# Altium PCB PCB1.PcbDoc
Units mm, origin at the board's own origin, x right, y up, seen from the top; angles counter-clockwise.
Board outline 86.75 x 72.01 mm, 2 copper layers (Top Layer, Bottom Layer); 34 components, 29 nets, 148 pads, 15 vias.
Unrouted connection lines stored in the file: 1.
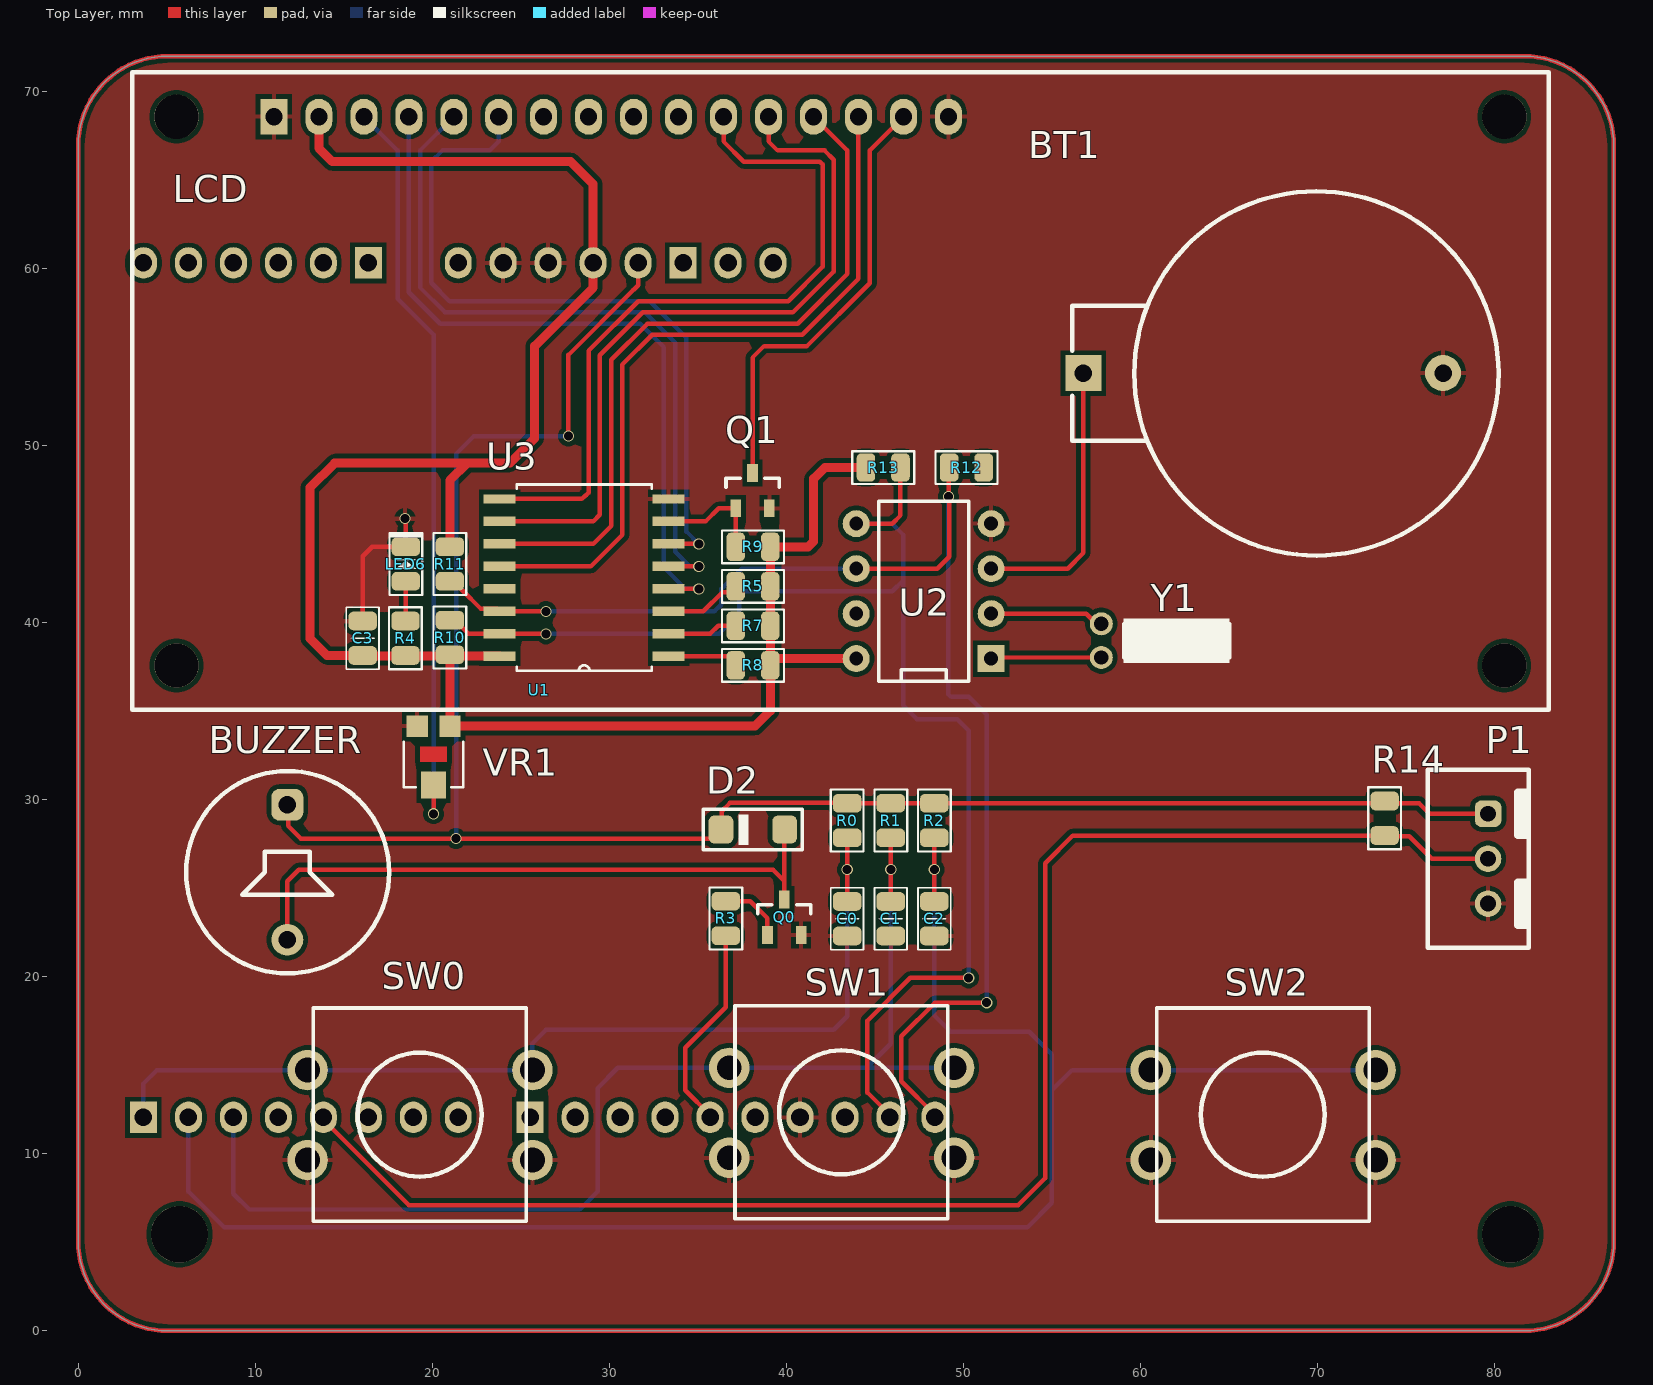
[diagram p0: Top Layer view]
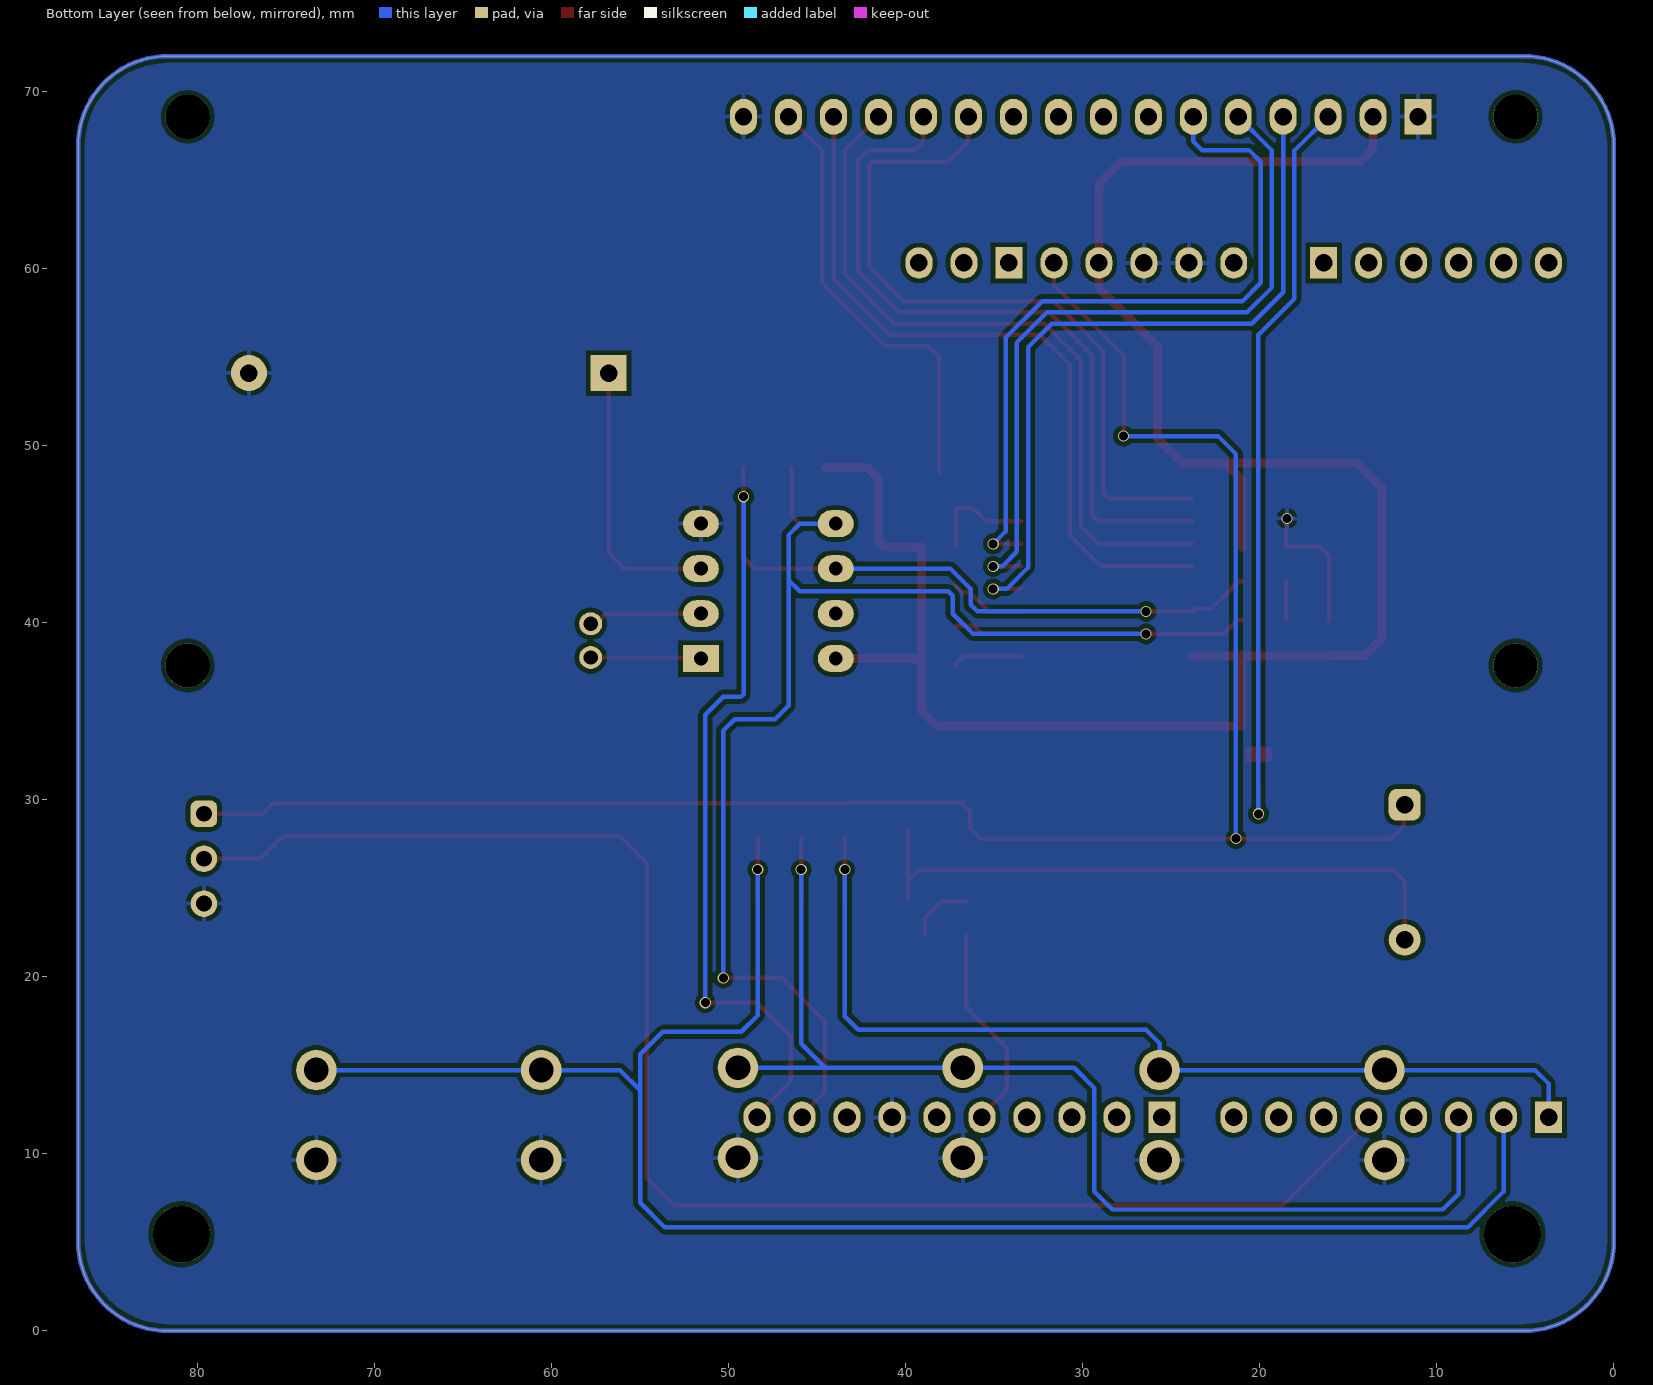
[diagram p1: Bottom Layer view, seen from below]

## Layer stack, top to bottom
Top Solder: solder mask 0.0102, Solder Resist, Dk 3.5
Top Layer: signal copper 0.0356
Dielectric 1: dielectric 0.32, FR-4, Dk 4.8
Bottom Layer: signal copper 0.0356
Bottom Solder: solder mask 0.0102, Solder Resist, Dk 3.5

## Board outline
-0.013,5.08 -0.013,66.929 cw(c5.067,66.929) 5.067,72.009 81.661,72.009 cw(c81.661,66.929) 86.741,66.929 86.741,5.08 cw(c81.661,5.08) 81.661,0 5.067,0 cw(c5.067,5.08)

## Design rules (kind name [scope] priority, off if disabled: settings)
Clearance [All] p1: gap=0.254 ignorepadtopadclearanceinfootprint=FALSE except(0: Arc-Hole Track-Hole SMDPad-Hole THPad-Hole Via-Hole Fill-Hole Poly-Hole Region-Hole Text-Hole; 0.381: Arc-Arc Arc-Track Arc-SMDPad Arc-THPad Arc-Via Track-Track Track-SMDPad Track-THPad Track-Via SMDPad-SMDPad SMDPad-THPad SMDPad-Via THPad-THPad THPad-Via Via-Via)
DiffPairsRouting [All] p1: maxlimit=0.508 minlimit=0.508 mostfreqgap=0.508 toplayer_minwidth=0.254 toplayer_maxwidth=0.508 toplayer_prefwidth=0.381 bottomlayer_minwidth=0.254 bottomlayer_maxwidth=0.508 bottomlayer_prefwidth=0.381 maxuncoupledlength=12.7
PolygonConnect [All] p1: connectstyle=Relief reliefconductorwidth=0.254 reliefentries=4 polygonreliefangle="90 Angle" airgapwidth=0.254
RoomDefinition Sheet1 [InComponentClass('Sheet1')] p1: confinementstyle=ConfineIn formatcopy=TRUE lockcomponents=FALSE outline -90.297,-40.767 -39.497,-40.767 -39.497,-15.367 -90.297,-15.367
RoutingVias [All] p1: holewidth=0.508 width=0.635 viastyle="Through Hole" minholewidth=0.508 minwidth=0.635 maxholewidth=0.508 maxwidth=0.635
SolderMaskExpansion [All] p1: expansion=0.102 istentingtop=FALSE
Width 5V [InNet('+5')] p1: maxlimit=0.508 minlimit=0.508 preferedwidth=0.508
Width Signal [All] p2: maxlimit=0.508 minlimit=0.254 preferedwidth=0.254
29 further rules are at their usual default settings.

## Components (designator, comment, footprint, x,y, rotation, side; value= is the part's Value field where it differs from the comment)
BT1 "Battery" "CON CR2032" 59.309,54.102 r0 top
BUZZER "Buzzer" BUZZER 11.811,29.718 r270 top
C0 "100nf" "C 0805 (2012)" 43.434,23.282 r270 top
C1 "100nf" "C 0805 (2012)" 45.892,23.282 r270 top
C2 "100nf" "C 0805 (2012)" 48.35,23.282 r270 top
C3 "1uf" "C 0805 (2012)" 16.068,39.125 r270 top
D2 "Diode" SOD-80 38.1,28.321 r180 top
LCD "LCD 16x2" "LCD 16x2" 11.049,68.58 r0 top
LED6 "Led" "Led SMD 0805" 18.501,43.316 r270 top
P1 "DHT" XH2.54-3P 79.629,24.13 r270 top
Q0 "Transistor NPN" SOT-23 39.878,23.368 r90 top
Q1 "Transistor NPN" SOT-23 38.086,47.459 r90 top
R0 "10k" "R 0805 (2012)" 43.434,28.829 r90 top
R1 "10k" "R 0805 (2012)" 45.892,28.829 r90 top
R2 "10k" "R 0805 (2012)" 48.35,28.829 r90 top
R3 "4.7k" "R 0805 (2012)" 36.576,23.296 r90 top
R4 "1k" "R 0805 (2012)" 18.481,39.125 r270 top
R5 "10k" "R 0805 (2012)" 38.111,42.06 r0 top
R7 "10k" "R 0805 (2012)" 38.111,39.829 r0 top
R8 "10k" "R 0805 (2012)" 38.111,37.597 r0 top
R9 "4.7k" "R 0805 (2012)" 38.111,44.291 r0 top
R10 "4.7k" "R 0805 (2012)" 20.991,39.166 r270 top
R11 "4.7k" "R 0805 (2012)" 20.991,43.316 r90 top
R12 "4.7k" "R 0805 (2012)" 50.165,48.768 r0 top
R13 "4.7k" "R 0805 (2012)" 45.466,48.768 r180 top
R14 "4.7k" "R 0805 (2012)" 73.787,28.956 r270 top
SW0 "Tact Switch" "SW/4/DIP 12x12x7" 25.654,14.732 r180 top
SW1 "Tact Switch" "SW/4/DIP 12x12x7" 49.467,14.859 r180 top locked
SW2 "Tact Switch" "SW/4/DIP 12x12x7" 73.279,14.732 r180 top
U1 "STM32F103RBT6 Shield" "Arduino Uno R3 Shield 2xPins" 34.163,60.325 r270 top
U2 "DS1307" "DIP 8" 51.562,37.973 r90 top
U3 "PCF8574" SOIC127P1032X265-16N 28.575,42.545 r180 top
VR1 "5k" "R Var 3mm" 20.066,32.385 r180 top
Y1 "Crystal" "Crystal DIP-2" 57.785,38.989 r0 top

## Footprints (in the part's own frame and the unit in brackets; to place one, negate y for a bottom-side part, rotate by r counter-clockwise, add the part's x,y. Pads: shape width x height; smd on the part's side, far side on the other; paste and mask are expansions set on the pad)
"Arduino Uno R3 Shield 2xPins" [mil]
  rect 70x60 / inner round 60 / far side rect 70x60 hole 39: 1(0,0) 7(0,-700) 13(1900,-1200) 21(1900,-340)
  oval 70x60 / inner round 60 / far side oval 70x60 hole 39: 2(0,-100) 3(0,-200) 4(0,-300) 5(0,-400) 6(0,-500) 8(0,-800) 9(0,-900) 10(0,-1000) 11(0,-1100) 12(0,-1200) 14(1900,-1100) 15(1900,-1000) 16(1900,-900) 17(1900,-800) 18(1900,-700) 19(1900,-600) 20(1900,-500) 22(1900,-240) 23(1900,-140) 24(1900,-40) 25(1900,60) 26(1900,160) 27(1900,260) 28(1900,360) 29(1900,460) 30(1900,560) 31(0,200) 32(0,100)
BUZZER [mm] "DC Buzzer 5V/12V"
  rrect50% 1.8x1.8 hole 1: 1(0,0)
  round 1.8 hole 1: 2(7.62,0)
  silkscreen extent -1.91,-5.71 9.53,5.75, body extent -5.64,-6 9.81,6, height 9.65
"C 0805 (2012)" [mm] "Chip Capacitor, 2-Leads, Body 2.0x1.3mm, IPC Medium Density"
  rrect50% 1.05x1.6 smd: 1(-0.975,0) 2(0.975,0)
  silkscreen extent -1.75,-0.92 1.75,0.92, body extent -1,-0.62 1,0.63, height 0.6
"CON CR2032" [mil]
  rect 80x80 / inner round 60 / far side rect 80x80 hole 39: 1(-100,0)
  round 80 / inner round 60 / far side round 80 hole 39: 2(700,0)
  silkscreen extent -125,-406 823,404, body extent -232,-448 898,448, height 279
"Crystal DIP-2" [mm] "Available for crystal 32.768kHz"
  round 1.3 hole 0.8: 1(0,0.953) 2(0,-0.953)
  silkscreen extent 1.25,-1.25 7.25,1.25, body extent -0.1,-1 7.04,1, height 2.1
"DIP 8" [mil] "DIP IC (2.54mm), 8 pins"
  rect 60x60 / inner round 60 / far side rect 60x80 hole 31: 1(0,0)
  round 60 / inner round 60 / far side oval 60x80 hole 31: 2(100,0) 3(200,0) 4(300,0) 5(300,300) 6(200,300) 7(100,300) 8(0,300)
  silkscreen extent -50,50 350,250, body extent -47,-15 347,310, height 201
"LCD 16x2" [mil]
  rect 60x80 / inner round 60 / far side rect 60x80 hole 38: 1(0,0)
  oval 60x80 / inner round 60 / far side oval 60x80 hole 38: 2(100,0) 3(200,0) 4(300,0) 5(400,0) 6(500,0) 7(600,0) 8(700,0) 9(800,0) 10(900,0) 11(1000,0) 12(1100,0) 13(1200,0) 14(1300,0) 15(1400,0) 16(1500,0)
  round 98.43 hole 98.43: HOLE(-216.54,0) HOLF(2736.22,0) HOLG(2736.22,-1220.47) HOLH(-216.54,-1220.47)
  silkscreen extent -315,-1319 2835,98, body extent -314,-1318 2845,100, height 710
"Led SMD 0805" [mm] "Led SMD 0805"
  rrect50% 1.05x1.6 smd: 1(-0.975,0) 2(0.975,0)
  silkscreen extent -1.75,-0.93 1.75,0.92, body extent -1.01,-0.63 1.01,0.62, height 1.1
"R 0805 (2012)" [mm] "Chip Resistor, 2-Leads, Body 2.0x1.3mm, IPC Medium Density"
  rrect50% 1.05x1.6 smd: 1(-0.975,0) 2(0.975,0)
  silkscreen extent -1.75,-0.92 1.75,0.92, body extent -1,-0.61 1,0.59, height 0.5
"R Var 3mm" [mm]
  rect 1.2x1.2 smd: 1(-0.925,-1.775) 3(0.925,-1.775)
  rect 1.4x1.5 smd: 2(0,1.55)
  Top Layer region: -0.76,-0.635 0.764,-0.635 0.764,0.254 -0.76,0.254
  silkscreen extent -1.68,-0.9 1.68,1.68, body extent -1.55,-1.85 1.55,1.84, height 1.95
SOD-80 [mm] "SOD-80 MiniMelf Diod case LL4148 3.7x1.6x0.5mm"
  rrect50% 1.4x1.6 smd: 1(1.8,0) 2(-1.8,0)
  silkscreen extent -2.79,-1.14 2.79,1.14, body extent -1.8,-0.74 1.8,0.76, height 1.5
SOIC127P1032X265-16N [mil]
  rect 71x21 smd: 1(-188,175) 2(-188,125) 3(-188,75) 4(-188,25) 5(-188,-25) 6(-188,-75) 7(-188,-125) 8(-188,-175) 9(188,-175) 10(188,-125) 11(188,-75) 12(188,-25) 13(188,25) 14(188,75) 15(188,125) 16(188,175)
  silkscreen extent -150,-207 150,207
SOT-23 [mm] "SOT23, 3-Leads, Body 3.0x2.5mm (max), Pitch 0.95mm, IPC Medium Density"
  rect 1x0.6 smd: 1(-1,0.95) 2(-1,-0.95) 3(1,0)
  silkscreen extent 0.2,-1.5 0.7,1.5, body extent -1.28,-1.46 1.27,1.46, height 0.95
"SW/4/DIP 12x12x7" [mil]
  round 90 hole 55: 1(0,0) 2(0,200) 3(500,200) 4(500,0)
  silkscreen extent 14,-138 487,336, body extent -11,-137 511,335, height 309
XH2.54-3P [mm]
  rrect50% 1.5x1.5 hole 0.9: 1(-5.08,0)
  round 1.5 hole 0.9: 2(-2.54,0) 3(0,0)
  silkscreen extent -7.58,-3.4 2.5,2.4, body extent -7.42,-3.4 2.34,2.44, height 7.21

## Part data
C0 C1 C2 C3: library part "Capacitor NP", "Capacitor non-pol"
D2: "Default Diode", Code_JEDEC=DO-214-AB, LatestRevisionDate=17-Jul-2002, LatestRevisionNote="Re-released for DXP Platform.", PackageReference=SMC, PackageVersion=Sep-1996, Published=8-Jun-2000, Publisher="Altium Limited"
LCD: "Character LCD 16x2"
LED6: "Typical LED"
P1: library part "Header 3", "Header, 3-Pin"
Q0 Q1: "NPN Bipolar Transistor"
R0 R1 R2 R3 R4 R5 R7 R8 R9 R10 R11 R12 R13 R14: library part Resistor, "Resistor", LatestRevisionDate=17-Jul-2002, LatestRevisionNote="Re-released for DXP Platform.", PackageReference=AXIAL-0.3, Published=8-Jun-2000, Publisher="Altium Limited"
SW0 SW1 SW2: library part "SW SPST-4", "Tact switch 4 pin"
U1: library part "Arduino Uno R3 shield", "Arduino Uno R3 shield pins connection"
U3: "Remote 8-Bit I/O Expander for I  2C Bus"
VR1: library part "Resistor Variable", "Resistor Variable"

## Free pads (board coordinates)
  round 3.2 hole 3.2: 4(5.715,5.461) 4(80.899,5.461)

## Via types
v1: diameter 0.635, hole 0.508, Top Layer to Bottom Layer, 15 vias

## Nets (pads, with @x,y where several pads share a name; then routed paths per layer and width w, separated by ;. In a path a pad name is that pad's centre, name@x,y a point inside that pad or via, vN(x,y) a via of type N, cw(c..) or ccw(c..) an arc to the next point about the centre after c; other vN are vias at no path point)
3V3: BUZZER.1 D2.1 P1.1 R0.2 R1.2 R2.2 R14.1 U1.2 | length 110.8
  Top Layer w0.254: BUZZER.1 11.867,29.662 11.867,28.519 12.573,27.813 v1(21.336,27.813) 35.771,27.813 36.318,28.359 36.338,28.359 36.338,29.353 36.808,29.823 43.415,29.823 R0.2 R1.2 R2.2 75.733,29.804 76.327,29.21 P1.1 ; v1(27.686,50.546) 27.686,55.127 31.36,58.801 31.369,58.801 31.623,59.055 U1.2
  Bottom Layer w0.254: v1(21.336,27.813) 21.336,49.53 22.352,50.546 v1(27.686,50.546)
+5: C3.2 LCD.2 R4.2 R5.2 R7.2 R8.2 R9.2 R10.2 R11.2 R12.2 R13.2 U1.3 U2.8 U3.16 VR1.1 | length 118.5
  Top Layer w0.508: LCD.2 13.589,66.802 14.351,66.04 27.813,66.04 29.083,64.77 U1.3 29.083,58.928 25.781,55.626 25.781,50.419 24.384,49.022 21.971,49.022 ; R10.2 R10.2@20.991,38.113 ; R11.2 20.991,48.042 21.971,49.022 ; U3.16 23.787,38.113 R10.2@20.991,38.113 ; U2.8 39.356,37.973 R8.2@39.086,37.703 ; R13.2 42.164,48.768 41.529,48.133 41.529,44.589 41.231,44.291 R9.2 R5.2 R7.2 R8.2@39.086,37.703 ; R10.2@20.991,38.113 16.105,38.113 C3.2 14.047,38.15 13.081,39.116 13.081,47.625 14.478,49.022 21.971,49.022 ; R10.2@20.991,38.113 VR1.1 38.224,34.16 39.086,35.022 R8.2 R8.2@39.086,37.703
"BUTTON 0": C0.1 R0.1 SW0.1 SW0.4 U1.13 | length 56
  Top Layer w0.254: C0.1 v1(43.434,26.056) R0.1
  Bottom Layer w0.254: U1.13 3.683,13.97 4.445,14.732 SW0.4 SW0.1 25.654,16.256 26.416,17.018 42.672,17.018 43.434,17.78 v1(43.434,26.056)
"BUTTON 1": C1.1 R1.1 SW1.1 SW1.4 U1.15 | length 67.5
  Top Layer w0.254: C1.1 v1(45.892,26.056) R1.1
  Bottom Layer w0.254: U1.15 8.763,7.747 9.652,6.858 28.321,6.858 29.337,7.874 29.337,13.716 30.48,14.859 SW1.4 44.54,14.859 ; v1(45.892,26.056) 45.892,16.211 44.54,14.859 ; SW1.1 44.54,14.859
"BUTTON 2": C2.1 R2.1 SW2.1 SW2.4 U1.14 | length 100.9
  Top Layer w0.254: C2.1 v1(48.35,26.056) R2.1
  Bottom Layer w0.254: U1.14 6.223,7.874 8.255,5.842 53.594,5.842 54.991,7.239 54.991,13.589 ; v1(48.35,26.056) 48.35,17.817 49.276,16.891 53.721,16.891 54.991,15.621 54.991,13.589 ; SW2.1 SW2.4 56.134,14.732 54.991,13.589
BUZZER: R3.1 U1.25 | length 11.8
  Top Layer w0.254: U1.25 35.687,12.192 34.29,13.589 34.29,16.002 36.576,18.288 R3.1
DHT_INPUT: P1.2 R14.2 U1.17 | length 87.6
  Top Layer w0.254: U1.17 13.843,11.938 18.669,7.112 53.086,7.112 54.61,8.636 54.61,26.416 56.175,27.981 R14.2 ; R14.2@73.713,27.94 75.184,27.94 76.454,26.67 P1.2
GND: BT1.2 C0.2 C1.2 C2.2 C3.1 LCD.1 LCD.16 LED6.1 P1.3 Q0.2 Q1.2 SW0.2 SW0.3 SW1.2 SW1.3 SW2.2 SW2.3 U1.4 U1.5 U1.27 U2.4 U3.8 VR1.3 | length 7.9
  Top Layer w0.254: C3.1 16.068,43.754 16.605,44.291 LED6.1 18.501,45.843 v1(18.456,45.888)
NetBT1_1: BT1.1 U2.3 | length 15.7
  Top Layer w0.254: U2.3 55.88,43.053 56.769,43.942 BT1.1
NetBUZZER_2: BUZZER.2 D2.2 Q0.3 | length 35.9
  Top Layer w0.254: BUZZER.2 11.811,25.4 12.457,26.046 39.243,26.046 39.889,25.4 ; Q0.3 39.889,24.379 39.889,25.4 ; D2.2 39.889,28.31 39.889,25.4
NetLCD_3: LCD.3 VR1.2 | length 42.6
  Top Layer w0.254: v1(20.066,29.21) VR1.2
  Bottom Layer w0.254: LCD.3 18.034,66.675 18.034,58.293 20.066,56.261 v1(20.066,29.21)
NetLCD_4: LCD.4 U3.4 | length 42.1
  Top Layer w0.254: U3.4@33.46,41.91 v1(35.052,41.91)
  Bottom Layer w0.254: LCD.4 18.669,58.674 20.447,56.896 31.75,56.896 33.084,55.562 33.084,43.116 34.29,41.91 v1(35.052,41.91)
NetLCD_5: LCD.5 U3.5 | length 41.2
  Top Layer w0.254: U3.5@33.46,43.18 v1(35.052,43.18)
  Bottom Layer w0.254: LCD.5 19.304,66.675 19.304,58.937 20.71,57.531 32.013,57.531 33.718,55.826 33.718,44.005 34.544,43.18 v1(35.052,43.18)
NetLCD_6: LCD.6 U3.6 | length 41.7
  Top Layer w0.254: U3.6@33.46,44.45 v1(35.052,44.45)
  Bottom Layer w0.254: LCD.6 23.749,67.183 23.241,66.675 20.574,66.675 19.939,66.04 19.939,59.2 20.973,58.166 32.276,58.166 34.353,56.089 34.353,45.148 v1(35.052,44.45)
NetLCD_11: LCD.11 U3.9 | length 41.7
  Top Layer w0.254: U3.9 28.448,46.99 28.664,47.206 28.68,47.206 28.829,47.355 28.829,55.372 31.623,58.166 40.105,58.166 42.037,60.098 42.037,65.891 41.888,66.04 37.592,66.04 36.449,67.183 LCD.11
NetLCD_12: LCD.12 U3.10 | length 41.8
  Top Layer w0.254: U3.10 29.083,45.72 29.464,46.101 29.464,55.109 31.886,57.531 40.368,57.531 42.672,59.835 42.672,66.154 42.151,66.675 39.497,66.675 38.989,67.183 LCD.12
NetLCD_13: LCD.13 U3.11 | length 41.1
  Top Layer w0.254: U3.11 29.083,44.45 30.099,45.466 30.099,54.846 32.149,56.896 40.631,56.896 43.434,59.699 43.434,66.675 LCD.13
NetLCD_14: LCD.14 U3.12 | length 41.8
  Top Layer w0.254: U3.12 28.956,43.18 30.734,44.958 30.734,54.583 32.412,56.261 40.894,56.261 44.069,59.436 LCD.14
NetLCD_15: LCD.15 Q1.3 | length 25.1
  Top Layer w0.254: Q1.3 38.086,54.977 38.735,55.626 41.157,55.626 44.704,59.173 44.704,66.675 LCD.15
NetLED6_2: LED6.2 R4.1 | length 2.2
  Top Layer w0.254: R4.1 18.491,40.11 18.491,42.331 LED6.2
NetQ0_1: Q0.1 R3.2 | length 3.7
  Top Layer w0.254: R3.2 37.959,24.271 38.928,23.302 Q0.1
NetQ1_1: Q1.1 R9.1 U3.7 | length 6.1
  Top Layer w0.254: U3.7@33.46,45.72 35.433,45.72 36.172,46.459 Q1.1 R9.1
NetR5_1: R5.1 U3.3 | length 4.3
  Top Layer w0.254: U3.3@33.46,40.64 35.306,40.64 36.379,41.713 36.789,41.713 R5.1
NetR7_1: R7.1 U3.2 | length 3.9
  Top Layer w0.254: U3.2@33.46,39.37 35.687,39.37 36.146,39.829 R7.1
NetR8_1: R8.1 U3.1 | length 4
  Top Layer w0.254: U3.1@33.46,38.1 35.475,38.1 36.748,38.1 37.136,37.712 R8.1
NetU2_1: U2.1 Y1.2 | length 6.2
  Top Layer w0.254: U2.1 51.625,38.036 Y1.2
NetU2_2: U2.2 Y1.1 | length 6.5
  Top Layer w0.254: U2.2 56.93,40.513 57.502,39.941 Y1.1
SCL: R11.1 R12.1 U1.30 U2.6 U3.14 | length 76.8
  Top Layer w0.254: R11.1 21.193,42.341 21.664,41.87 21.664,41.863 22.747,40.78 23.66,40.78 U3.14 v1(26.416,40.64) ; U2.6 48.514,43.053 49.19,43.729 49.19,47.076 v1(49.149,47.117) 49.17,47.138 49.17,48.747 R12.1 ; U1.30 48.387,12.192 46.482,14.097 46.482,16.637 48.387,18.542 v1(51.308,18.542)
  Bottom Layer w0.254: v1(26.416,40.64) 35.941,40.64 36.322,41.021 36.322,41.91 37.465,43.053 U2.6 ; v1(49.149,47.117) 49.149,35.963 49.298,35.814 50.292,35.814 51.308,34.798 v1(51.308,18.542)
SDA: R10.1 R13.1 U1.29 U2.5 U3.15 | length 76.7
  Top Layer w0.254: R10.1 21.266,40.141 22.037,39.37 U3.15 v1(26.416,39.37) ; U2.5 45.974,45.593 46.441,46.06 R13.1 ; U1.29 45.847,12.192 44.577,13.462 44.577,17.526 46.99,19.939 v1(50.292,19.939)
  Bottom Layer w0.254: v1(26.416,39.37) 36.195,39.37 37.338,40.513 37.338,41.529 37.592,41.783 45.974,41.783 46.609,42.418 ; U2.5 45.974,45.593 46.609,44.958 46.609,42.418 ; v1(50.292,19.939) 50.292,33.909 49.657,34.544 47.371,34.544 46.609,35.306 46.609,42.418
pads on no net: LCD.7 LCD.8 LCD.9 LCD.10 LCD.HOLE LCD.HOLF LCD.HOLG LCD.HOLH U1.1 U1.6 U1.7 U1.8 U1.9 U1.10 U1.11 U1.12 U1.16 U1.18 U1.19 U1.20 U1.21 U1.22 U1.23 U1.24 U1.26 U1.28 U1.31 U1.32 U2.7 U3.13

## Polygon pours and split planes (outlines as drawn)
GND on Top Layer "GND_L01_P000" (solid, remove dead copper, pour order 0): -11.684,78.232 -7.239,73.787 97.536,73.787 97.536,-5.461 90.805,-12.192 85.09,-6.477 -10.795,-6.477
GND on Bottom Layer "GND_L02_P003" (solid, remove dead copper, pour order 3): -11.303,81.153 89.281,81.153 108.458,61.976 108.458,-22.098 7.239,-22.098 -9.017,-5.842

## Other copper
Multi-Layer:
  the board outline again, w0.254